# Altium PCB Copy of rhd_board.PcbDoc
Units mil, origin at the board's own origin, x right, y up, seen from the top; angles counter-clockwise.
Board outline 370.08 x 579.06 mil, 5 copper layers (Top Layer, Mid-Layer 1, Mid-Layer 2, Mid-Layer 3, Bottom Layer), stack 43.228 mil thick; 28 components, 59 nets, 181 pads, 29 vias.
Unrouted connection lines stored in the file: 37.
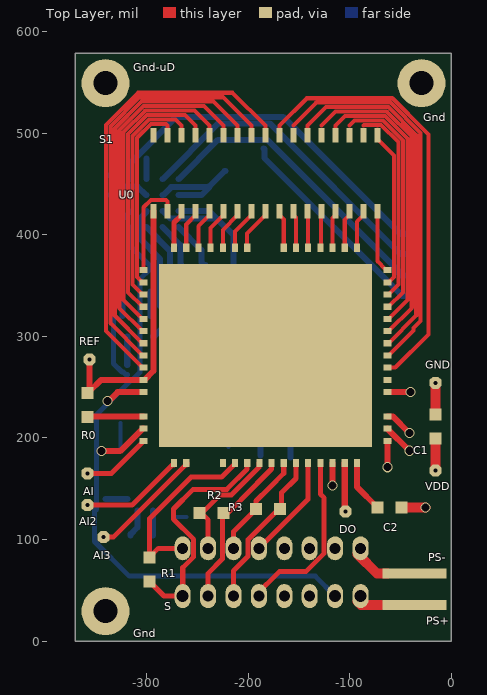
[diagram p0: Top Layer view]
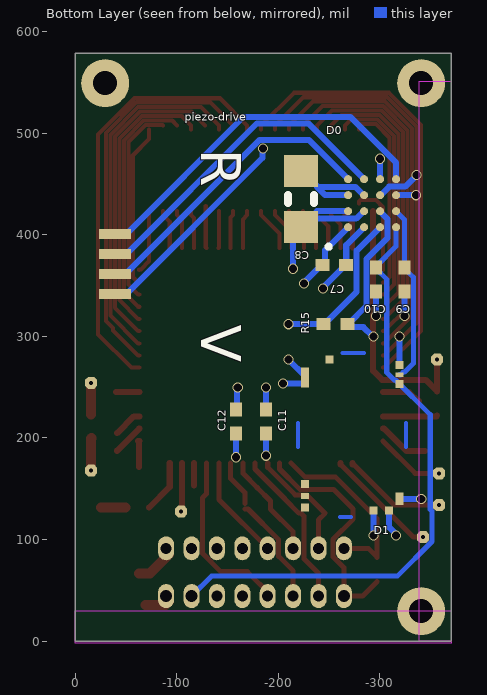
[diagram p1: Bottom Layer view, seen from below]
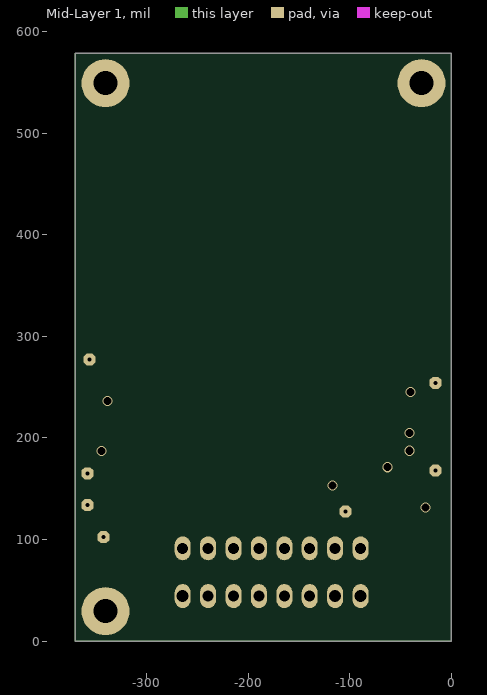
[diagram p2: Mid-Layer 1]
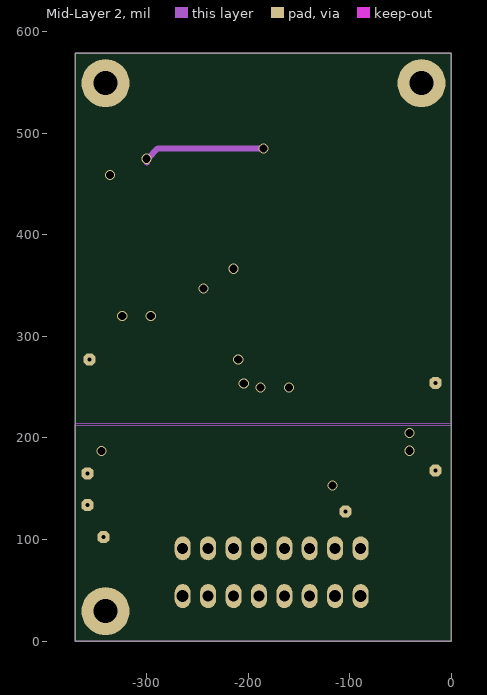
[diagram p3: Mid-Layer 2]
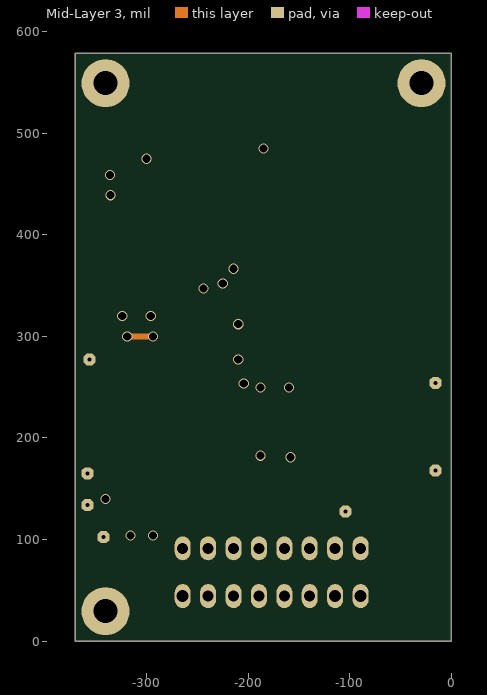
[diagram p4: Mid-Layer 3]

## Layer stack, top to bottom
Top Layer: signal copper 0.4724
Dielectric 1: core 0.8661, FR-4, Dk 4.2
Adhesive 1: prepreg 5, Dk 4.2
Mid-Layer 1: signal copper 0.4724
Dielectric2: core 10, FR-4, Dk 4.2
Mid-Layer 2: signal copper 0.4724
Dielectric3: core 10, FR-4, Dk 4.2
Mid-Layer 3: signal copper 0.4724
Dielectric 4: prepreg 5, Dk 4.2
Adhesive 1: core 10, Dk 4.2
Bottom Layer: signal copper 0.4724

## Board outline
-370.08,-0.32 -370.08,578.74 0,578.74 0,-0.32

## Design rules (kind name [scope] priority, off if disabled: settings)
Clearance [All] p1: gap=0.39 ignorepadtopadclearanceinfootprint=FALSE
ComponentClearance [All] p1: gap=5 collisioncheckmode=3 verticalgap=10 showdistances=TRUE
DiffPairsRouting [InDifferentialPairClass('All Differential Pairs')] p1: maxlimit=100 minlimit=5 mostfreqgap=5 toplayer_minwidth=5 toplayer_maxwidth=15 toplayer_prefwidth=10 midlayer1_minwidth=5 midlayer1_maxwidth=15 midlayer1_prefwidth=10 midlayer2_minwidth=5 midlayer2_maxwidth=15 midlayer2_prefwidth=10 midlayer3_minwidth=5 midlayer3_maxwidth=15 midlayer3_prefwidth=10 bottomlayer_minwidth=5 bottomlayer_maxwidth=15 bottomlayer_prefwidth=10 maxuncoupledlength=500
HoleToHoleClearance [All] p1: gap=7.87 allowstackedmicrovias=TRUE
LayerPairs [All] p1 off: enforce=TRUE
MatchedLengths DiffPair_MatchedLengths [InDifferentialPair ('D_MOSI')] p1: tolerance=1000 checknetsindiffpair=FALSE checkdiffpairvsdiffpair=TRUE checkxsignals=TRUE checkothers=TRUE
PasteMaskExpansion [All] p1 off: expansion=0
PermittedLayers [All] p1: toplayerpermitted=TRUE bottomlayerpermitted=TRUE
PolygonConnect [All] p1: connectstyle=Relief reliefconductorwidth=10 reliefentries=4 polygonreliefangle="90 Angle" airgapwidth=10
RoutingVias [All] p1: holewidth=8 width=10 viastyle="Through Hole" minholewidth=3 minwidth=5 maxholewidth=15 maxwidth=20
SilkToSolderMaskClearance [IsPad] p1 off: minsilkscreentomaskgap=10 clearancetoexposedcopper=TRUE
SolderMaskExpansion [All] p1 off: expansion=4
Width Width_elect_net [InNetClass('electrode_net')] p1: maxlimit=48 minlimit=4 preferedwidth=10
Width Width_width [InNetClass('signal_net')] p2: maxlimit=10 minlimit=5 preferedwidth=10
Width Width_power [All] p3: maxlimit=10 minlimit=6 preferedwidth=10
24 further rules are at their usual default settings.

## Classes and differential pairs
net class pow_net: GND GND-udrive NetC2_1 NetDO_1 NetR0_2 STIM+ STIM- VCC VCC-udrive
net class signal_net: CS+ CS- MISO+ MISO- MOSI+ MOSI- NetAI2_1 NetAI3_1 NetAI_1 NetS1_B2 NetS1_B3 NetS1_B4 NetS1_B5 NetS1_B6 NetS1_B7 NetS1_B8 NetS1_B9 NetS1_B10 NetS1_B11 NetS1_B12 NetS1_B13 NetS1_B14 NetS1_B15 NetS1_B16 NetS1_B17 NetS1_T2 NetS1_T3 NetS1_T4 NetS1_T5 NetS1_T6 NetS1_T7 NetS1_T8 NetS1_T9 NetS1_T10 NetS1_T11 NetS1_T12 NetS1_T13 NetS1_T14 NetS1_T15 NetS1_T16 NetS1_T17 SCL SCLK+ SCLK- SDA
net class electrode_net: NetS1_B2 NetS1_B3 NetS1_B4 NetS1_B5 NetS1_B6 NetS1_B7 NetS1_B8 NetS1_B9 NetS1_B10 NetS1_B11 NetS1_B12 NetS1_B13 NetS1_B14 NetS1_B15 NetS1_B16 NetS1_B17 NetS1_T2 NetS1_T3 NetS1_T4 NetS1_T5 NetS1_T6 NetS1_T7 NetS1_T8 NetS1_T9 NetS1_T10 NetS1_T11 NetS1_T12 NetS1_T13 NetS1_T14 NetS1_T15 NetS1_T16 NetS1_T17
differential pair D_CS: +CS+ -CS-
differential pair D_SCLK: +SCLK+ -SCLK-
differential pair D_MOSI: +MOSI+ -MOSI-
differential pair D_MISO: +MISO+ -MISO-

## Components (designator, comment, footprint, x,y, rotation, side; value= is the part's Value field where it differs from the comment)
AI "PCB Test Point" TESTPOINT_SMALL -358.27,165.18 r0 top
AI2 "PCB Test Point" TESTPOINT_SMALL -358.27,133.86 r90 top
AI3 "PCB Test Point" TESTPOINT_SMALL -342.52,102.36 r90 top
C1 "Capacitor" 0402-SMALL -15.75,211.34 r90 top
C2 "Capacitor" 0402-SMALL -61.02,131.57 r0 top
C7 "470n" CAPC0603X03L -255,370 r0 bottom
C8 "10u" CAPC1608X09L -222.44,435.04 r90 bottom
C9 "470n" CAPC0603X03L -324,356.19 r90 bottom
C10 "470n" CAPC0603X03L -296,356 r270 bottom
C11 "470n" CAPC0603X03L -187.92,216 r270 bottom
C12 "470n" CAPC0603X03L -158.39,216 r270 bottom
D0 "NSD-2101" BGA16C40P4X4_175X175X63 -292.26,431.1 r90 bottom
D1 "NSE-5310_FC" NSE-5310_FC -248.03,124.02 r90 bottom locked
DO "PCB Test Point" TESTPOINT_SMALL -104.33,127.64 r90 top
GND "PCB Test Point" TESTPOINT_SMALL -15.75,254.27 r90 top
piezo-drive "sql-rv-1.8-6-12" sql-rv-1.8-6-12 -196.85,506.3 r0 bottom
PS+ "2-2" KP-025-04 -36.46,35.69 r180 top
PS- "2-2" KP-025-04 -36.46,66.61 r180 top
R0 "Resistor" 0201-SMALL -358.27,232.28 r90 top
R1 "Resistor" 0201-SMALL -297.24,70.55 r270 top
R2 "Resistor" 0201-SMALL -236.22,125.98 r0 top
R3 "Resistor" 0201-SMALL -180.51,130.08 r0 top
R15 "0" RESC0603X03L -256,312 r180 bottom
REF "PCB Test Point" TESTPOINT_SMALL -356.3,277.24 r90 top
S "Omnetics_PZN-16-DD" OMNETICS_PZN-16-DD -177.17,66.93 r180 top
S1 "Molex 3.5mm Pitch Slimstack 34 pin connector" MOLEX_504618-3410 -183.07,460.63 r0 top
U0 "Intan Technologies RHD2132 chip" RHD2000_56PIN_COB -183.07,281.18 r0 top
VDD "PCB Test Point" TESTPOINT_SMALL -15.75,168.03 r90 top

## Footprints (in the part's own frame and the unit in brackets; to place one, negate y for a bottom-side part, rotate by r counter-clockwise, add the part's x,y. Pads: shape width x height; smd on the part's side, far side on the other; paste and mask are expansions set on the pad)
0201-SMALL [mm]
  rect 0.3x0.3 smd: 1(-0.3,0) 2(0.3,0)
0402-SMALL [mm]
  rect 0.3x0.3 smd: 1(-0.3,0) 2(0.3,0)
  body extent -0.55,-0.3 0.55,0.3
BGA16C40P4X4_175X175X63 [mm]
  round 0.2 smd: A1(-0.6,0.6) A2(-0.2,0.6) A3(0.2,0.6) A4(0.6,0.6) B1(-0.6,0.2) B2(-0.2,0.2) B3(0.2,0.2) B4(0.6,0.2) C1(-0.6,-0.2) C2(-0.2,-0.2) C3(0.2,-0.2) C4(0.6,-0.2) D1(-0.6,-0.6) D2(-0.2,-0.6) D3(0.2,-0.6) D4(0.6,-0.6)
  silkscreen extent -1.14,1.04 -1.04,1.14, body extent -0.87,-0.88 0.88,0.87, height 0.25
CAPC0603X03L [mm]
  rect 0.35x0.3 smd: 1(-0.3,0) 2(0.3,0)
  body extent -0.67,-0.35 0.67,0.35, height 0.33
CAPC1608X09L [mm]
  rect 0.8x0.85 smd: 1(-0.7,0) 2(0.7,0)
  silkscreen extent -0.1,-0.33 0.1,0.33, body extent -1.25,-0.58 1.25,0.58, height 0.95
KP-025-04 [mm]
  rect 1.6x0.25 smd: 1(0,0)
  body extent -0.9,-0.23 0.9,0.23
MOLEX_504618-3410 [mm]
  rect 0.16x0.36 smd paste+0 mask+0: 1(-2.8,-0.95) 2(-2.8,0.95) 3(-2.45,-0.95) 4(-2.45,0.95) 5(-2.1,-0.95) 6(-2.1,0.95) 7(-1.75,-0.95) 8(-1.75,0.95) 9(-1.4,-0.95) 10(-1.4,0.95) 11(-1.05,-0.95) 12(-1.05,0.95) 13(-0.7,-0.95) 14(-0.7,0.95) 15(-0.35,-0.95) 16(-0.35,0.95) 17(0,-0.95) 18(0,0.95) 19(0.35,-0.95) 20(0.35,0.95) 21(0.7,-0.95) 22(0.7,0.95) 23(1.05,-0.95) 24(1.05,0.95) 25(1.4,-0.95) 26(1.4,0.95) 27(1.75,-0.95) 28(1.75,0.95) 29(2.1,-0.95) 30(2.1,0.95) 31(2.45,-0.95) 32(2.45,0.95) 33(2.8,-0.95) 34(2.8,0.95)
  body extent -4.05,-1 4.05,1, height 0.58
NSE-5310_FC [mm]
  rect 0.2x0.2 smd: 3(0.19,0.56) 5(0.781,0.56) 7(3.295,0.56) 8(3.484,0.56) 8(3.587,0.56) 9(3.888,-0.057) 11(3.75,-1.807) 13(3.28,-1.807) 18(0.351,-1.807) 18(0.468,-1.807) 19(0.112,-1.549) 19(0.112,-1.161)
  rect 0.15x0.2 smd: 4(0.48,0.56)
  rect 0.116x0.116 smd: 8(3.484,0.56) 18(0.401,-1.807)
  rect 0.116x0.2 smd: 12(3.51,-1.807)
  Top Layer lines w0.1: 1.7,-1.973 2.3,-1.973 ; 4.05,-0.923 4.05,-0.386 ; -0.05,-0.6 -0.05,-0.323 ; 1.7,0.727 2.3,0.727
  body extent -0.2,-2.12 4.2,0.88, height 1.02
OMNETICS_PZN-16-DD [mm]
  oval 0.4x0.6 hole 0.3 mask+0.05: B1(2.219,0.571) B7(-1.591,0.571) B8(-2.226,0.571)
  oval 0.4x0.6 hole 0.275 mask+0.05: B2(1.584,0.571) B3(0.949,0.571) B4(0.314,0.571) B5(-0.321,0.571) B6(-0.956,0.571) T1(2.219,-0.622) T2(1.584,-0.622) T3(0.949,-0.622) T4(0.314,-0.622) T5(-0.321,-0.622) T6(-0.956,-0.622) T7(-1.591,-0.622) T8(-2.226,-0.622)
RESC0603X03L [mm]
  rect 0.35x0.3 smd: 1(-0.3,0) 2(0.3,0)
  body extent -0.17,-0.17 0.17,0.17, height 0.25
RHD2000_56PIN_COB [mil]
  rect 8x6 smd paste+0: 1(-120,84) 2(-120,72) 3(-120,60) 4(-120,48) 5(-120,36) 6(-120,24) 7(-120,12) 8(-120,0) 9(-120,-12) 10(-120,-24) 11(-120,-36) 12(-120,-60) 13(-120,-72) 14(-120,-84) 29(120,-84) 30(120,-72) 31(120,-60) 32(120,-36) 33(120,-24) 34(120,-12) 35(120,0) 36(120,12) 37(120,24) 38(120,36) 39(120,48) 40(120,60) 41(120,72) 42(120,84)
  rect 6x8 smd paste+0: 15(-90,-106) 16(-78,-106) 17(-42,-106) 18(-30,-106) 19(-18,-106) 20(-6,-106) 21(6,-106) 22(18,-106) 23(30,-106) 24(42,-106) 25(54,-106) 26(66,-106) 27(78,-106) 28(90,-106) 43(90,106) 44(78,106) 45(66,106) 46(54,106) 47(42,106) 48(30,106) 49(18,106) 50(-18,106) 51(-30,106) 52(-42,106) 53(-54,106) 54(-66,106) 55(-78,106) 56(-90,106)
  rect 210x180 smd paste+0: CENTER(0,0)
sql-rv-1.8-6-12 [mm]
  rect 0.8x0.25 smd: P1-1(4,2.685) P1-2(4,4.185) P2-1(4,3.185) P2-2(4,3.685)
  Top Layer region: 0,0
  Top Layer region: 0,0
  body extent -0.02,0 4.5,6, height 2.78
TESTPOINT_SMALL [mm]
  oct 0.3x0.3 hole 0.1: 1(0,0)

## Part data
AI AI2 AI3 DO GND REF VDD: library part TESTPOINT_SMALL, DeviceName=_SMALL, DeviceSetName=TESTPOINT, GateName_1=TP$1, LibraryName=RHD2000_eval_board, Package=TESTPOINT_SMALL, SymbolName_1=TESTPOINT
C1 C2: library part C_0201-SMALL, Package=0201, DeviceName=_0201, DeviceSetName=C, GateName_1=C, LibraryName=RHD2000_eval_board, SymbolName_1=C
C7 C9 C10 C11 C12: library part Cap-0201, "Capacitor", LatestRevisionDate=10-Jul-2010, Publisher=RVS
C8: library part Cap-0603, "Capacitor", LatestRevisionDate=10-Jul-2010, Publisher=RVS
piezo-drive: "Squiggle motor"
PS+ PS-: library part KP-025X04
R0 R1 R2 R3: library part R_0201-SMALL, Package=0201, DeviceName=_0201, DeviceSetName=R, GateName_1=R, LibraryName=RHD2000_eval_board, SymbolName_1=R
R15: library part Res-0201, "Resistor", LatestRevisionDate=10-Jul-2010, Publisher=RVS
S: Package=OMNETICS_PZN-12-AA, DeviceSetName=RHD2000-CABLE-DAQ-SIDE, GateName_1=A, LibraryName=RHD2000_eval_board, SymbolName_1=RHD2000-CABLE
S1: library part MOLEX_504618-3410, Package=OMNETICS_A79024, DeviceSetName=OMNETICS_A79024, GateName_1=A, LibraryName=RHD2000_eval_board, SymbolName_1=OMNETICS_A7902X
U0: library part RHD2132_COB, Package=RHD2000_56PIN_COB, DeviceName=_COB, DeviceSetName=RHD2132, GateName_1=A, LibraryName=RHD2000, SymbolName_1=RHD2132

## Free pads (board coordinates)
  round 47.24 hole 23.62: 2(-340.55,29.53) 2(-340.55,549.21) 2(-29.53,549.21)

## Via types
v1: diameter 10, hole 8, Mid-Layer 2 to Bottom Layer, 11 vias
v2: diameter 10, hole 8, Mid-Layer 3 to Bottom Layer, 10 vias
v3: diameter 10, hole 8, Top Layer to Mid-Layer 2, 4 vias
v4: diameter 10, hole 8, Top Layer to Mid-Layer 1, 4 vias

## Nets (pads, with @x,y where several pads share a name; then routed paths per layer and width w, separated by ;. In a path a pad name is that pad's centre, name@x,y a point inside that pad or via, vN(x,y) a via of type N, cw(c..) or ccw(c..) an arc to the next point about the centre after c; other vN are vias at no path point)
1-1: D0.D4 piezo-drive.P1-1 | length 358.5
  Bottom Layer w6: D0.D4 -315.89,470.98 -270.78,516.09 -165.69,516.09 -50.64,401.03 piezo-drive.P1-1@-40,401.03
1-2: D0.C4 piezo-drive.P1-2 | length 353.3
  Mid-Layer 2 w6: v1@-299.53,471.22 -299.53,474.86 -299.08,474.86 -288.95,485 v1(-185,485)
  Bottom Layer w6: D0.C4 v1(-300.14,474.86) ; v1(-185,485) -184.23,484.23 -184.23,475.57 -48.66,340 piezo-drive.P1-2@-39.37,340
2-1: D0.B4 piezo-drive.P2-1 | length 319.2
  Bottom Layer w6: D0.B4 -229.42,509.69 -178.98,509.69 -50.2,380.91 piezo-drive.P2-1@-41.34,380.91
2-2: D0.A4 piezo-drive.P2-2 | length 301
  Bottom Layer w6: D0.A4 -229.97,493.39 -181.52,493.39 -52.12,363.99 -52.12,363.14 -48.98,360 piezo-drive.P2-2@-39.37,360
ADR: D0.C2 D1.11 R15.2 | length 214.5
  Mid-Layer 3 w6: v2(-319.15,300) v2(-293.75,300)
  Bottom Layer w6: D1.11@-319.15,272 v2(-319.15,300) ; D0.C2 -300.14,422.72 -307.47,415.39 -307.47,396.87 -286.7,376.11 -286.7,329.91 -269.08,312.29 R15.2@-269.08,312 ; v2(-293.75,300) -292.67,300 -283.57,309.09 -270.72,309.09 R15.2
CS+: R1.2 S.B1 U0.19 | length 229
  Top Layer w5: R1.2 -282.94,44.43 S.B1@-267.1,44.43 ; S.B1 -264.52,72.24 -253.75,83 -253.75,100.21 -273.62,120.08 -273.62,130.08 -254.23,149.47 -221.12,149.47 -201.07,169.52 U0.19
CS-: R1.1 S.T1 U0.18 | length 181.8
  Top Layer w5: R1.1 R1.1@-297.24,82.68 ; S.T1 -288.52,91.4 R1.1@-297.24,82.68 ; U0.18@-212.6,175.18 -226.36,161.42 -256.43,161.42 -297.24,120.6 R1.1@-297.24,82.68
GND: C1.2 C2.2 GND.1 pad.2@-29.53,549.21 pad.2@-340.55,29.53 R0.1 S1.2 S.T6 U0.11 U0.12 U0.17 U0.29 U0.32 U0.CENTER | length 197.2
  Top Layer w6: R0.1@-356.3,222.13 -355.35,221.18 U0.12 ; v4(-338.58,236.22) -337.5,236.22 -328.54,245.18 U0.11 ; U0.32 v4(-40.46,245.18) ; v4(-62.99,171.26) -62.99,197.1 U0.29 U0.29@-62.07,197.18
  Top Layer w10: C2.2 v4(-25.59,131.57) ; C1.2 GND.1
GND-udrive: C7.1 C8.1 C9.1 C10.2 C11.1 C12.1 D0.A2 D0.B1 D0.B2 D0.C3 D1.7 D1.8 pad.2@-340.55,549.21 S.T5 | length 411.6
  Bottom Layer w6: v1(-336,458.72) -324.67,447.39 -309.06,447.39 -300.64,438.98 D0.C3 ; v1(-324,320) C9.1 ; v1(-296,320) C10.2 ; D0.B1 -266.81,389.9 C7.1 ; D0.B2 -283.88,423.23 -276.55,415.9 C8.1@-230.86,415.9 ; D0.A2 -238.19,423.23 C8.1@-230.86,415.9 ; C7.1@-265.83,370 -244,348.17 v1(-244,347.19) ; D1.7 v1(-204.51,253.76) ; D1.8@-226,261.17 v1(-209.93,277.24) ; v1(-214.52,366.52) -214.52,399.56 C8.1@-230.86,415.9 ; C11.1 v1(-187.92,249.76) ; v1(-160,249.76) -159.23,249 -159.23,228.65 C12.1
MISO+: S.B4 U0.25 | length 177.3
  Top Layer w5: S.B4 -192.32,45.57 -169.45,68.44 -143.32,68.44 -125.31,86.45 -125.31,136.08 -125.31,141.05 -129.07,144.82 U0.25
MISO-: S.T4 U0.24 | length 103.7
  Top Layer w5: S.T4 -141.4,139.52 U0.24@-141.4,175.18
MOSI+: R3.2 S.B3 U0.23 | length 152.1
  Top Layer w5: S.B3 -214.52,69.24 -200.29,83.47 -200.29,99.8 -170.01,130.08 R3.2 R3.2@-167.32,130.08 ; R3.2@-167.23,135.73 -167.23,146.05 -153.07,160.21 U0.23
MOSI-: R3.1 S.T3 U0.22 | length 104.3
  Top Layer w5: S.T3 -214.52,107.73 -192.32,129.92 R3.1 -192.32,137.93 -179.23,151.02 -165.07,165.18 U0.22
NetAI2_1: AI2.1 U0.15 | length 103.3
  Top Layer w5: AI2.1 -314.41,133.86 U0.15
  Top Layer w6: U0.15@-273.07,174.18 U0.15
NetAI3_1: AI3.1 U0.16 | length 113.4
  Top Layer w5: AI3.1 -332.89,102.36 -261.07,174.18 U0.16
  Top Layer w6: U0.16@-261.07,173.97 U0.16
NetAI_1: AI.1 U0.14 | length 68.3
  Top Layer w5: AI.1 -334.74,165.18 U0.14@-303.07,196.85
NetC2_1: C2.1 U0.28 | length 52
  Top Layer w6: U0.28 -93.07,151.81 C2.1
NetDO_1: DO.1 U0.27 | length 47.9
  Top Layer w6: U0.27 -105.07,128.38 DO.1
NetR0_2: R0.2 REF.1 S1.1 U0.10 | length 260.1
  Top Layer w6: REF.1 -356.3,245.75 -344.87,257.18 U0.10 -302.07,257.18 -293.31,265.94 S1.1@-293.31,423.23
NetS1_B2: S1.3 U0.1 | length 90.9
  Top Layer w4: U0.1 -303.07,427.09 -295.94,434.21 -281.03,434.21 -279.53,432.71 -279.53,430.79
NetS1_B3: S1.5 U0.56 | length 39.1
  Top Layer w5: U0.56 -273.07,411.97 -265.75,419.29 S1.5@-265.75,423.23
NetS1_B4: S1.7 U0.55 | length 39.8
  Top Layer w4: U0.55 -261.07,410.19 -251.97,419.29 S1.7@-251.97,423.23
NetS1_B5: S1.9 U0.54 | length 40.6
  Top Layer w4: U0.54 -249.07,408.41 -238.19,419.29 S1.9@-238.19,423.23
NetS1_B6: S1.11 U0.53 | length 41.3
  Top Layer w4: U0.53 -237.07,406.63 -224.41,419.29 S1.11@-224.41,423.23
NetS1_B7: S1.13 U0.52 | length 42
  Top Layer w4: U0.52 -225.07,404.85 -210.63,419.29 S1.13@-210.63,423.23
NetS1_B8: S1.15 U0.51 | length 42.8
  Top Layer w4: U0.51 -213.07,403.07 -196.86,419.29 S1.15@-196.85,423.23
NetS1_B9: S1.17 U0.50 | length 43.5
  Top Layer w4: U0.50 -201.07,401.29 -183.08,419.29 S1.17@-183.07,423.23
NetS1_B10: S1.19 U0.49 | length 37.8
  Top Layer w4: S1.19@-169.29,423.23 -169.29,419.29 -165.07,415.07 U0.49
NetS1_B11: S1.21 U0.48 | length 37.1
  Top Layer w4: S1.21@-155.51,423.23 -155.51,419.29 -153.07,416.85 U0.48
NetS1_B12: S1.23 U0.47 | length 36.5
  Top Layer w4: S1.23@-141.74,423.23 -141.4,423.23 -141.4,387.51 U0.47
NetS1_B13: S1.25 U0.46 | length 41.3
  Top Layer w4: U0.46 -128.51,387.74 S1.25@-128.51,428.26
NetS1_B14: S1.27 U0.45 | length 37.2
  Top Layer w4: U0.45 -117.07,416.4 -114.18,419.29 S1.27@-114.18,423.23
NetS1_B15: S1.29 U0.44 | length 38
  Top Layer w4: U0.44 -105.07,414.62 -100.4,419.29 S1.29@-100.4,423.23
NetS1_B16: S1.31 U0.43 | length 38.7
  Top Layer w4: U0.43 -93.07,412.84 -86.62,419.29 S1.31@-86.62,423.23
NetS1_B17: S1.33 U0.42 | length 63.1
  Top Layer w4: S1.33@-72.84,423.23 -72.84,373.95 -64.72,365.83 -63.07,365.83 U0.42
NetS1_T2: S1.4 U0.2 | length 185.6
  Top Layer w4: U0.2 -304.07,353.18 -309.46,358.57 -309.46,495.49 -295.94,509.02 -281.03,509.02 -279.53,507.51 S1.4@-279.53,503.62
NetS1_T3: S1.6 U0.3 | length 222.3
  Top Layer w4: U0.3 -304.07,341.18 -313.86,350.97 -313.86,497.31 -297.76,513.41 -271.65,513.41 -265.75,507.51 S1.6@-265.75,503.62
NetS1_T4: S1.8 U0.4 | length 259
  Top Layer w4: U0.4 -304.07,329.18 -318.25,343.36 -318.25,499.13 -299.58,517.8 -262.26,517.8 -251.97,507.51 S1.8@-251.97,503.62
NetS1_T5: S1.10 U0.5 | length 295.7
  Top Layer w4: U0.5 -304.07,317.18 -322.65,335.76 -322.65,500.95 -301.4,522.2 -252.87,522.2 -238.19,507.51 S1.10@-238.19,503.62
NetS1_T6: S1.12 U0.6 | length 332.4
  Top Layer w4: U0.6 -304.07,305.18 -327.04,328.15 -327.04,502.77 -303.22,526.59 -243.49,526.59 -224.41,507.51 S1.12@-224.41,503.62
NetS1_T7: S1.14 U0.7 | length 369.1
  Top Layer w4: U0.7 -304.07,293.18 -331.43,320.54 -331.43,504.59 -305.04,530.98 -234.1,530.98 -210.63,507.51 S1.14@-210.63,503.62
NetS1_T8: S1.16 U0.8 | length 405.8
  Top Layer w4: U0.8 -304.07,281.18 -335.83,312.94 -335.83,506.41 -306.86,535.38 -224.72,535.38 -196.85,507.51 S1.16@-196.85,503.62
NetS1_T9: S1.18 U0.9 | length 442.5
  Top Layer w4: U0.9 -304.07,269.18 -340.22,305.33 -340.22,508.23 -308.68,539.77 -215.34,539.77 -183.08,507.51 S1.18@-183.08,503.62
NetS1_T10: S1.20 U0.34 | length 427.3
  Top Layer w4: S1.20@-169.3,503.62 -169.3,507.51 -142.43,534.38 -58.28,534.38 -25.92,502.02 -22.61,498.7 -22.61,301.94 -55.36,269.18 U0.34
NetS1_T11: S1.22 U0.35 | length 380
  Top Layer w4: -155.51,507.56 -133.09,529.98 -60.1,529.98 -30.32,500.2 -30.32,315.14 -37.39,308.06 -37.39,305.86 -62.07,281.18 U0.35
NetS1_T12: S1.24 U0.36 | length 347.2
  Top Layer w4: S1.24@-141.74,503.62 -141.74,507.51 -123.66,525.59 -61.92,525.59 -34.71,498.38 -34.71,320.54 -62.07,293.18 U0.36
NetS1_T13: S1.26 U0.37 | length 306.6
  Top Layer w4: -127.95,507.56 -114.32,521.2 -63.74,521.2 -39.1,496.56 -39.1,328.15 -62.07,305.18 U0.37
NetS1_T14: S1.28 U0.38 | length 273.8
  Top Layer w4: S1.28@-114.18,503.62 -114.18,507.51 -104.89,516.8 -65.56,516.8 -43.5,494.74 -43.5,335.76 -62.07,317.18 U0.38
NetS1_T15: S1.30 U0.39 | length 233.2
  Top Layer w4: -100.39,507.56 -95.55,512.41 -67.38,512.41 -47.89,492.92 -47.89,343.36 -62.07,329.18 U0.39
NetS1_T16: S1.32 U0.40 | length 196.5
  Top Layer w4: -86.61,507.56 -86.16,508.02 -69.2,508.02 -52.28,491.1 -52.28,350.97 -62.07,341.18 U0.40
NetS1_T17: S1.34 U0.41 | length 160.4
  Top Layer w4: S1.34@-72.84,503.62 -72.84,494.1 -56.68,477.93 -56.68,358.57 -62.07,353.18 U0.41
SCL: C10.1 D0.D1 D1.13 S.B7 | length 600
  Bottom Layer w5: D0.D1 -315.89,388.68 -296,368.79 C10.1@-296,368 ; C10.1 -296,366.83 -306.71,356.12 -306.71,264.34 -314.02,257.04 -315.27,257.04 -349.47,222.83 -349.47,129.71 -351.32,127.86 -351.32,98.21 -317.11,64 -134.11,64 S.B7
SCLK+: R2.2 S.B2 U0.21 | length 159
  Top Layer w5: S.B2@-239.52,43.31 S.B2 -239.52,66.79 -225.29,81.02 -225.29,122.99 -222.29,125.98 -220.11,125.98 -206.54,139.56 -206.54,139.94 -177.07,169.4 U0.21
SCLK-: R2.1 S.T2 U0.20 | length 116.3
  Top Layer w5: R2.1@-246.06,125.98 -239.52,119.44 S.T2 ; R2.1@-245.91,125.98 -228.19,143.7 -216.54,143.7 ; -216.54,144.08 -189.52,171.09 U0.20@-189.52,175.2
SDA: C9.2 D0.D2 D1.12 S.T7 | length 175
  Bottom Layer w5: C9.2 -324,367.02 -332.8,358.22 -332.8,273.33 -324.29,264.82 -322.98,264.82 -320.37,262.21 D1.12 ; C9.2@-324,368.13 -324,415.11 D0.D2
STIM+: PS+.1 S.B8 | length 24.3
  Top Layer w10: S.B8@-92.34,39.05 -88.98,35.69 -69.47,35.69
STIM-: PS-.1 S.T8 | length 37.6
  Top Layer w10: S.T8@-92.34,86.02 -92.34,85.61 -73.35,66.61 PS-.1@-63.07,66.61
VCC: C1.1 S.B6 U0.13 U0.26 U0.30 U0.31 VDD.1 | length 163.6
  Top Layer w6: v3(-344.49,187.01) -326.24,187.01 -304.07,209.18 U0.13 ; v3(-117.07,153.23) U0.26 ; U0.30 v3(-41.34,187.45) ; U0.31 -57.79,221.18 v3(-41.34,204.72)
  Top Layer w10: C1.1@-15.95,199.72 C1.1 VDD.1
VCC-udrive: C7.2 C8.2 C11.2 C12.2 D0.A1 D0.A3 D0.B3 D0.C1 D0.D3 D1.18 D1.19 R15.1 S.B5 | length 469.1
  Bottom Layer w6: v2(-340.67,139.82) D1.18@-319.15,139.82 ; v2(-335.61,438.98) D0.D3 ; v2(-315.89,104.11) -315.89,105.19 -309.04,112.04 D1.19@-309.04,128.42 ; D0.C1 -277.1,384.44 -277.1,343.92 -245.17,312 R15.1 ; v2(-293.75,104.11) D1.19@-293.75,128.42 ; D0.B3 -283.88,438.98 -276.01,446.85 C8.2@-238.19,446.85 ; D0.A1 -246.07,384.91 -246.07,372.88 C7.2 ; D0.A3 -246.06,438.98 C8.2@-238.19,446.85 ; R15.1@-243.19,312 v2(-209.93,312) ; C7.2@-242.21,370 -225.19,352.98 v2(-225.19,352) ; C8.2 -223.43,462.6 -238.19,447.83 C8.2@-238.19,446.85 ; v2(-187.92,182.57) C11.2 ; v2(-158.39,180.96) C12.2
pads on no net: D1.3 D1.4 D1.5 D1.9 U0.33

## Polygon pours and split planes (outlines as drawn)
GND on Mid-Layer 1 "GND" (solid, shelved, pour order 2): 0,578.74 0,-0.32 -370.08,-0.32 -370.08,578.74
GND-udrive on Mid-Layer 2 "GND-UDRIVE" (solid, shelved, pour order 6): -370.08,214.57 0,214.57 0,578.74 -370.08,578.74
VCC on Mid-Layer 2 "VCC" (solid, shelved, pour order 4): 0,212.6 0,-0.32 -370.08,-0.32 -370.08,212.6
VCC-udrive on Mid-Layer 3 "VCC-UDRIVE" (solid, shelved, pour order 8): 0,578.74 0,-0.32 -370.08,-0.32 -370.08,578.74

## Keep-outs
Mid-Layer 1:
  region: 0,-0.31
  region: 0,-0.31
Bottom Layer:
  region: -338.58,550.86 -370.39,550.86 -370.39,0 -338.58,0
  region: 0,-1.97 0,29.84 -370.08,29.84 -370.08,-1.97

## Silkscreen, mask and mechanical layers (free items; w line width, h text height)
Top Overlay:
  text "Gnd-uD" at -312.99,561.02 h7.87
  text "Gnd" at -27.56,511.81 h7.87
  text "Gnd" at -312.99,3.94 h7.87
Mechanical 5:
  lines w1: -398.57,214.57 28,214.57

## Text inside footprints (layer, text, board x,y; h text height)
piezo-drive: Bottom Overlay "V" at -124.02,311.42 h39.37 r90; Bottom Overlay "R" at -124.02,484.65 h39.37 r90